# Altium PCB LM386_2.PcbDoc
Units mm, origin at the board's own origin, x right, y up, seen from the top; angles counter-clockwise.
Board outline 20 x 50 mm, 2 copper layers (Top Layer, Bottom Layer); 12 components, 10 nets, 31 pads, 0 vias.
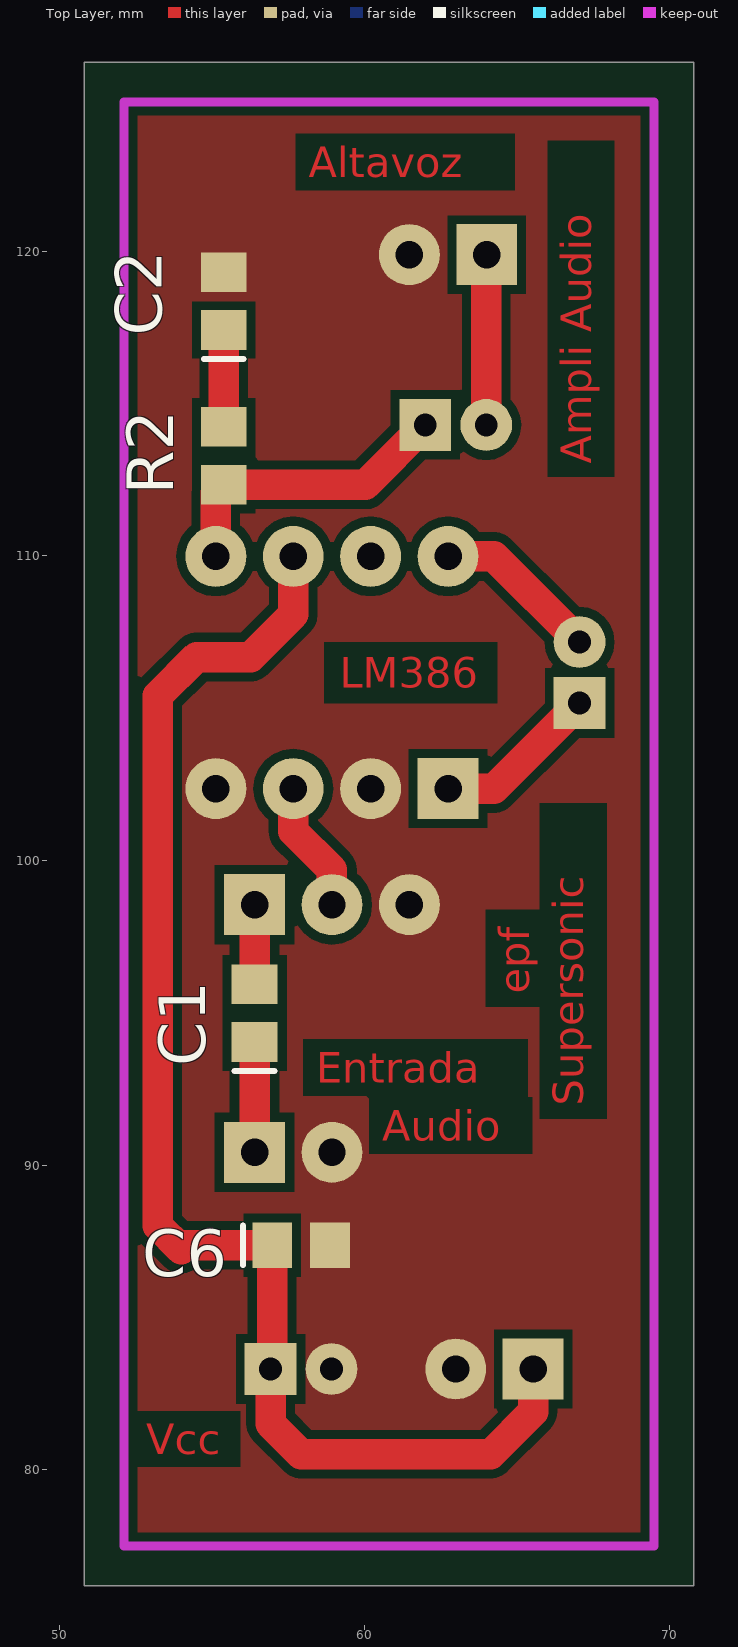
[diagram p0: Top Layer view]
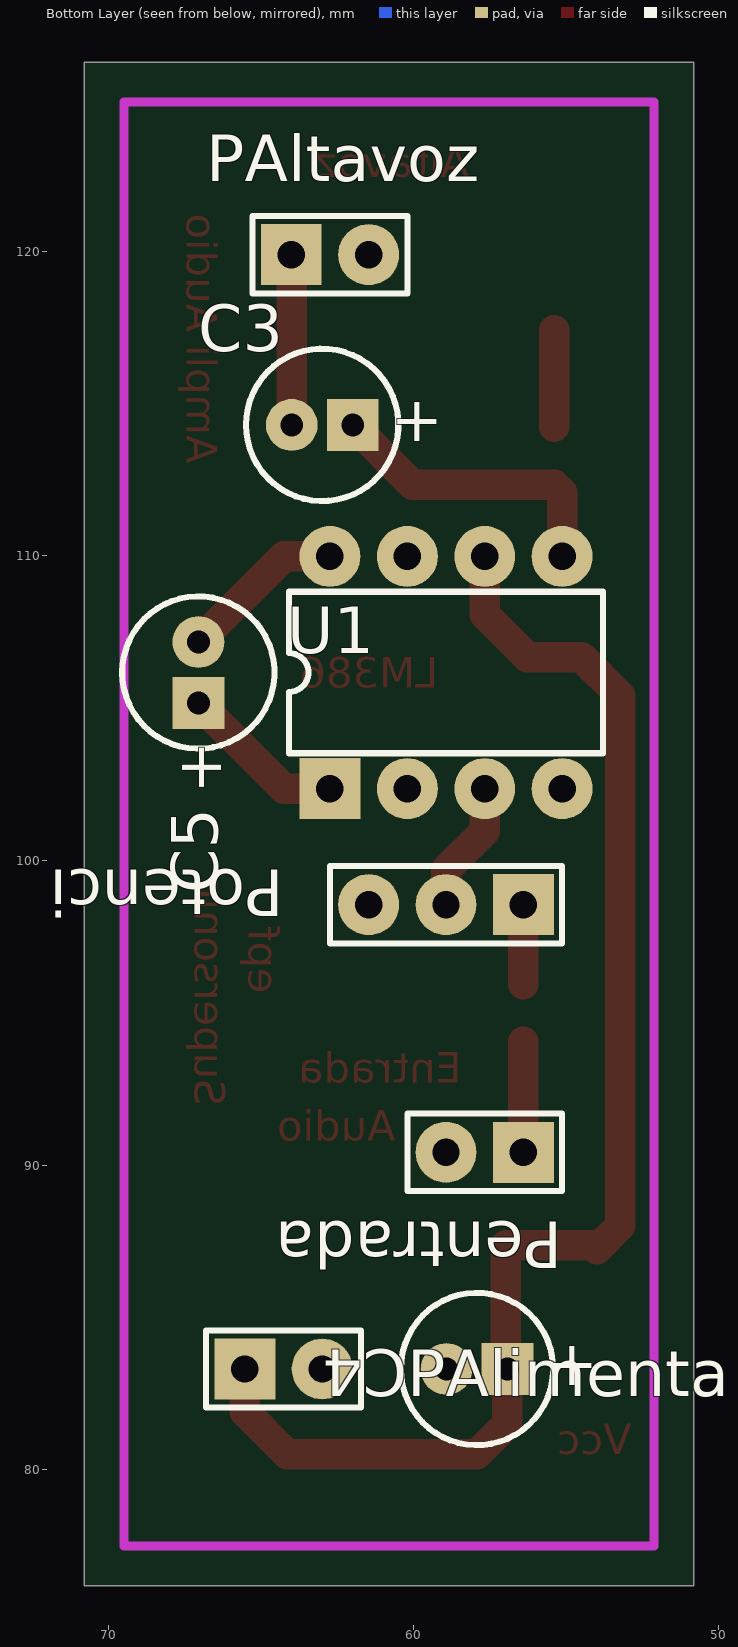
[diagram p1: Bottom Layer view, seen from below]

## Layer stack, top to bottom
Top Layer: signal copper 0.0356
Dielectric: dielectric 0.32, FR-4, Dk 4.8
Bottom Layer: signal copper 0.0356

## Board outline
50.8,76.2 70.8,76.2 70.8,126.2 50.8,126.2

## Design rules (kind name [scope] priority, off if disabled: settings)
Clearance [All] p1: gap=0.3
ComponentClearance [All] p1: gap=0.254 collisioncheckmode=3 verticalgap=0.254
PolygonConnect [All] p1: connectstyle=Direct reliefconductorwidth=0.254 reliefentries=4 polygonreliefangle="90 Angle"
RoomDefinition LM386_2 [InComponentClass('LM386_2')] p1: confinementstyle=ConfineIn formatcopy=TRUE lockcomponents=FALSE outline 50.673,75.438 71.247,75.438 71.247,126.619 50.673,126.619
RoutingVias [All] p1: holewidth=0.6 width=2 viastyle="Through Hole" minholewidth=0.711 minwidth=1.27 maxholewidth=1 maxwidth=3
SolderMaskExpansion [All] p1: expansion=0.102
TestPointUsage [All] p1: valid=0 allowmultiple=FALSE
Testpoint [All] p1: side=15 testpointundercomponent=TRUE minsize=1.016 maxsize=2.54 preferedsize=1.524 minholesize=0 maxholesize=1.016 preferedholesize=0.813 testpointgrid=0.025 style=1023 order=0123456789
Width [All] p1: maxlimit=2 minlimit=0.3 preferedwidth=0.5
18 further rules are at their usual default settings.

## Components (designator, comment, footprint, x,y, rotation, side; value= is the part's Value field where it differs from the comment)
C1 "Cap Pol3" C0805 56.388,94.996 r90 top
C2 "Cap Pol3" C0805 55.372,118.364 r90 top
C3 "Cap Pol1" B 62.992,114.3 r0 bottom
C4 "Cap Pol1" B 57.912,83.312 r0 bottom
C5 "Cap Pol1" B 67.056,106.172 r90 bottom
C6 "Cap Pol3" C0805 57.912,87.376 r0 top
PAlimentacion "Header 2" HDR1X2 65.532,83.312 r180 bottom
PAltavoz "Header 2" HDR1X2 64.008,119.888 r180 bottom
Pentrada "Header 2" HDR1X2 56.388,90.424 r0 bottom
Potenciometro "Header 3" HDR1X3 56.388,98.552 r0 bottom
R2 "Res Semi" 2012[0805] 55.372,113.284 r270 top
U1 "LM386N-1" N08E 58.928,106.172 r180 bottom

## Footprints (in the part's own frame and the unit in brackets; to place one, negate y for a bottom-side part, rotate by r counter-clockwise, add the part's x,y. Pads: shape width x height; smd on the part's side, far side on the other; paste and mask are expansions set on the pad)
2012[0805] [mm] "Chip Resistor; Body 2.0 x 1.3 mm (LxW typ)"
  rect 1.3x1.5 smd: 1(-0.95,0) 2(0.95,0)
B [mm] "Capacitor, Electrolytic, Radial; Body 5 x 6.8 mm (Dia.xH typ); Pin Spacing 2 mm (typ)"
  rect 1.7x1.7 hole 0.75: 1(-1,0)
  round 1.7 hole 0.75: 2(1,0)
  silkscreen extent -2.5,-2.5 2.5,2.5
C0805 [mm] "Chip Capacitor; Body 2.0 x 1.2 mm (LxW typ)"
  rect 1.3x1.5 smd: 1(-0.95,0) 2(0.95,0)
  silkscreen extent -1.9,-0.65 -1.9,0.65
HDR1X2 [mm] "Connector; Header; 2 Position"
  rect 2x2 hole 0.9: 1(0,0)
  round 2 hole 0.9: 2(2.54,0)
  silkscreen extent -1.27,-1.27 3.81,1.27
HDR1X3 [mm] "Connector; Header; 3 Position"
  rect 2x2 hole 0.9: 1(0,0)
  round 2 hole 0.9: 2(2.54,0) 3(5.08,0)
  silkscreen extent -1.27,-1.27 6.35,1.27
N08E [mm] "DIP; 8 Leads; Row Spacing 7.62 mm; Pitch 2.54 mm"
  rect 2x2 hole 0.9: 1(-3.81,-3.81)
  round 2 hole 0.9: 2(-1.27,-3.81) 3(1.27,-3.81) 4(3.81,-3.81) 5(3.81,3.81) 6(1.27,3.81) 7(-1.27,3.81) 8(-3.81,3.81)
  silkscreen extent -5.15,-2.65 5.15,2.65

## Part data
C1 C2 C6: "Polarized Capacitor (Surface Mount)"
C3 C4 C5: "Polarized Capacitor (Radial)"
PAlimentacion PAltavoz Pentrada: "Header, 2-Pin"
Potenciometro: "Header, 3-Pin"
R2: "Semiconductor Resistor"
U1: "Low-Voltage Audio Power Amplifier"

## Nets (pads, with @x,y where several pads share a name; then routed paths per layer and width w, separated by ;. In a path a pad name is that pad's centre, name@x,y a point inside that pad or via, vN(x,y) a via of type N, cw(c..) or ccw(c..) an arc to the next point about the centre after c; other vN are vias at no path point)
GND: C2.2 C4.2 C6.2 PAlimentacion.2 PAltavoz.2 Pentrada.2 Potenciometro.3 U1.2 U1.4
NetC1_1: C1.1 Pentrada.1 | length 3.6
  Top Layer w1: Pentrada.1 C1.1
NetC1_2: C1.2 Potenciometro.1 | length 2.6
  Top Layer w1: C1.2 Potenciometro.1
NetC2_1: C2.1 R2.1 | length 3.2
  Top Layer w1: R2.1 C2.1
NetC3_1: C3.1 R2.2 U1.5 | length 9.9
  Top Layer w1: U1.5 55.118,112.08 R2.2 60.026,112.334 C3.1
NetC3_2: C3.2 PAltavoz.1 | length 5.6
  Top Layer w1: C3.2 63.992,119.872 PAltavoz.1
NetC5_1: C5.1 U1.1 | length 5.5
  Top Layer w1: U1.1 64.246,102.362 C5.1
NetC5_2: C5.2 U1.8 | length 5.5
  Top Layer w1: U1.8 64.246,109.982 C5.2
NetPotenciometro_2: Potenciometro.2 U1.3 | length 4.3
  Top Layer w1: U1.3 57.658,100.965 58.928,99.695 Potenciometro.2
VCC: C4.1 C6.1 PAlimentacion.1 U1.6 | length 45.9
  Top Layer w1: U1.6 57.658,108.077 56.261,106.68 54.483,106.68 53.213,105.41 53.213,88.011 53.975,87.249 54.102,87.376 C6.1 56.962,83.362 C4.1 56.912,81.518 57.912,80.518 64.135,80.518 65.532,81.915 PAlimentacion.1
pads on no net: U1.7

## Polygon pours and split planes (outlines as drawn)
GND on Top Layer (solid, remove dead copper): 51.181,125.603 51.181,76.835 70.485,76.835 70.485,125.603

## Keep-outs
Keep-Out Layer:
  lines w0.3: 52.1,77.5 52.1,124.9 69.5,124.9 69.5,77.5 52.1,77.5

## Other copper
Top Layer:
  text "Altavoz" at 58.166,122.428 h1
  text "Ampli Audio" at 67.437,113.03 h1 r90
  text "LM386" at 59.182,105.664 h1
  text "epf" at 65.405,95.631 h1 r90
  text "Entrada" at 58.42,92.71 h1
  text "Supersonic" at 67.183,91.948 h1 r90
  text "Audio" at 60.579,90.805 h1
  text "Vcc" at 52.832,80.518 h1

## Dimensions
52.1,77.5 to 52.1,124.9 on Mechanical 1
52.1,77.5 to 69.5,77.5 on Mechanical 1

## Text inside footprints (layer, text, board x,y; h text height)
C3: Bottom Overlay "+" at 59.017,115.05 h1.5 r180
C4: Bottom Overlay "+" at 53.937,84.062 h1.5 r180
C5: Bottom Overlay "+" at 66.306,102.197 h1.5 r270